# EAGLE board i-uC (EAGLE 5.07)
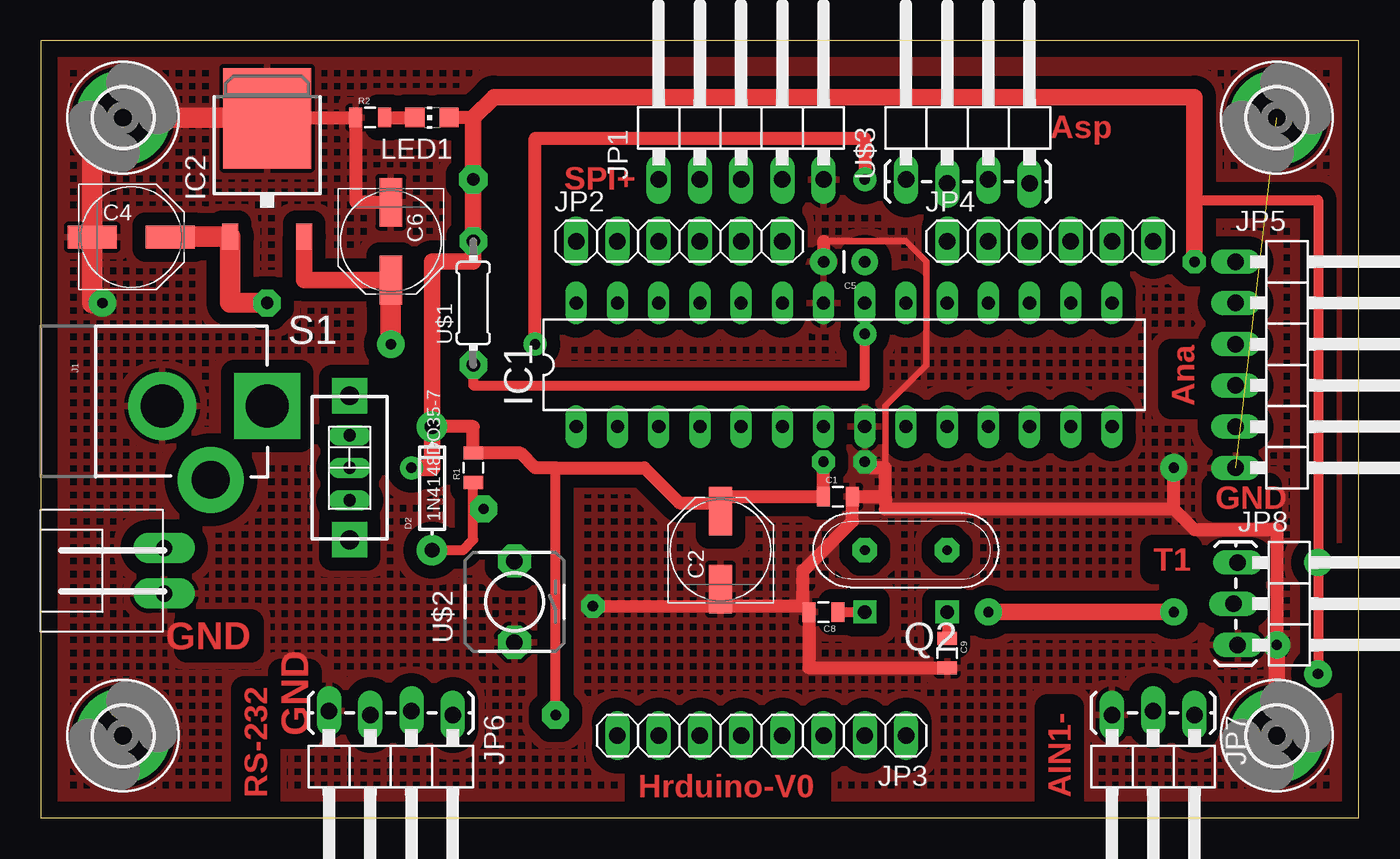
[diagram p0: board, top side]
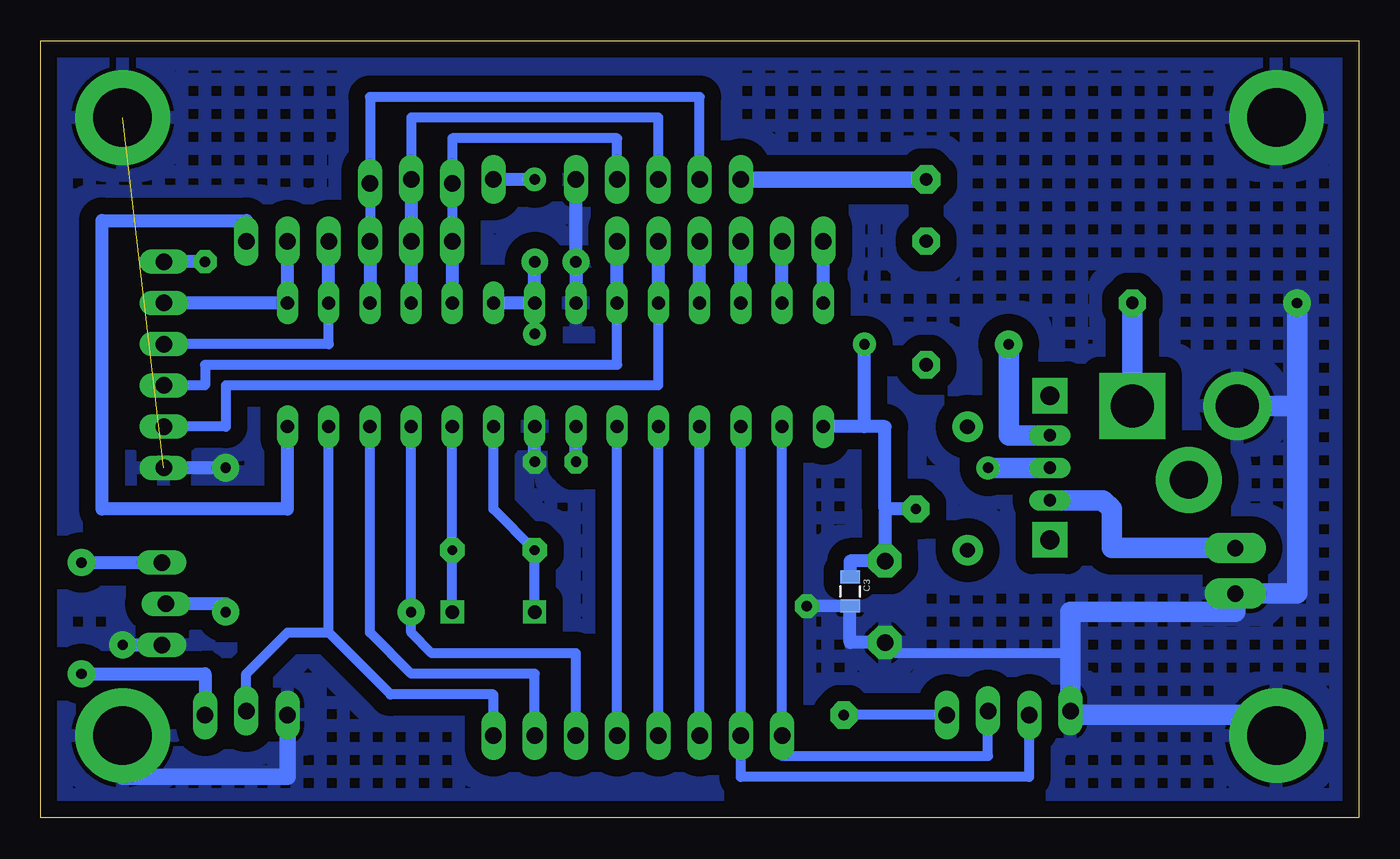
[diagram p1: board, bottom side, seen from below]

Size 81.26 x 47.93 mm. Coordinates in mm from the lower left corner, seen from the top.
Outline: 0,0 81.26,0 81.26,47.93 0,47.93 0,0
Copper layers (1*16): Top 0.035mm / dielectric 1.5mm / Bottom 0.035mm
Design rules "default": minimum track width 10mil, minimum drill 24mil, track to track 8mil, track to pad 8mil, pad to pad 8mil, via to via 8mil, smd to smd 8mil, copper to edge 40mil, drill to drill 8mil, minimum pad ring 10mil, minimum via ring 8mil, stop-mask expansion 4mil, vias tented up to drill 0mil, thermal gap 10mil

## Footprints (pad centres in the part's own frame; a part is rotated, then mirrored left to right if it is on the bottom)
0805 = smd 0.8 x 1.2: 1 -0.9,0; 2 0.9,0
PANASONIC_D = smd 3 x 1.4: + 2.4,0; - -2.4,0
CAP-PTH-SMALL = drill 0.7 pad 1.651 round: 1 0,0; 2 2.54,0
DIODE-1N4148 = drill 0.9 pad 1.88 round: A -3.81,0; C 3.81,0
3,6-PAD = drill 3.6 pad 5.842 round: B3,6 0,0
DIL28-3 = drill 0.813 long: 1 -16.51,-3.81; 2 -13.97,-3.81; 3 -11.43,-3.81; 4 -8.89,-3.81; 5 -6.35,-3.81; 6 -3.81,-3.81; 7 -1.27,-3.81; 8 1.27,-3.81; 9 3.81,-3.81; 10 6.35,-3.81; 11 8.89,-3.81; 12 11.43,-3.81; 13 13.97,-3.81; 14 16.51,-3.81; 15 16.51,3.81; 16 13.97,3.81; 17 11.43,3.81; 18 8.89,3.81; 19 6.35,3.81; 20 3.81,3.81; 21 1.27,3.81; 22 -1.27,3.81; 23 -3.81,3.81; 24 -6.35,3.81; 25 -8.89,3.81; 26 -11.43,3.81; 27 -13.97,3.81; 28 -16.51,3.81
TO252 = smd 1 x 1.6: 1 -2.28,-4.8; 2 2.28,-4.8 | smd 5.4 x 6.2: 3 0,2.5
POWER_JACK_2.1X5.5_BIG_PTH = drill 2.667 pad 4.191 round: GND 0,-0.127 | drill 2.337 pad 4.064 round: GNDBREAK 4.547,2.87 | drill 2.667 pad 4.064 square: PWR 0,6.35
1X05/90 = drill 1.016 long: 1 -5.08,-3.81; 2 -2.54,-3.81; 3 0,-3.81; 4 2.54,-3.81; 5 5.08,-3.81
1X06 = drill 1.016 long: 1 -6.35,0; 2 -3.81,0; 3 -1.27,0; 4 1.27,0; 5 3.81,0; 6 6.35,0
1X08 = drill 1.016 long: 1 -8.89,0; 2 -6.35,0; 3 -3.81,0; 4 -1.27,0; 5 1.27,0; 6 3.81,0; 7 6.35,0; 8 8.89,0
1X06/90 = drill 1.016 long: 1 -6.35,-3.81; 2 -3.81,-3.81; 3 -1.27,-3.81; 4 1.27,-3.81; 5 3.81,-3.81; 6 6.35,-3.81
1X04/90_LOCK = drill 1.016 long: 1 -3.81,-3.81; 2 -1.27,-4.064; 3 1.27,-3.81; 4 3.81,-4.064
1X03/90_LOCK = drill 1.016 long: 1 -2.54,-2.54; 2 0,-2.794; 3 2.54,-2.54
XH-1X2-LONG-LOCK = drill 1.016 pad 1.88 long: 1 -1.397,0; 2 1.397,0
CHIP-LED0805 = smd 1.2 x 1.2: A 0,-1.05; C 0,1.05
XTAL = drill 0.61 pad 1.524 octagon: 1 -2.54,0; 2 2.54,0
SWITCH-SPDT-AM#6 = drill 0.762 pad 1.27 long: 1 0,2; 2 0,0; 3 0,-2 | drill 1.15 pad 2.184 square: P$1 0,-4.445; P$2 0,4.445
0204/7 = drill 0.813 pad 1.676 octagon: 1 -3.81,0; 2 3.81,0
ALPS-SKHV = drill 1.016 pad 2.032 octagon: 2 -2.51,0; 3 2.51,0

## Placement (x,y rotation side)
C1  100n  [0805]  49.15,19.81 0 top
C2  100u  [PANASONIC_D]  41.91,16.51 90 top
C3  100n  [0805]  31.37,13.97 270 bottom
C4  100u  [PANASONIC_D]  5.59,35.81 0 top
C5  104  [CAP-PTH-SMALL]  50.8,34.29 180 top
C6  100u  [PANASONIC_D]  21.59,35.56 270 top
C8  33pF  [0805]  48.26,12.7 180 top
C9  33pF  [0805]  55.88,10.16 270 top
D2  1N4148DO35-7  [DIODE-1N4148]  24.13,20.32 90 top
H1  MOUNT-PAD-ROUND3.6  [3,6-PAD]  76.2,5.08 0 top
H2  MOUNT-PAD-ROUND3.6  [3,6-PAD]  5.08,43.18 0 top
H3  MOUNT-PAD-ROUND3.6  [3,6-PAD]  5.08,5.08 0 top
H4  MOUNT-PAD-ROUND3.6  [3,6-PAD]  76.2,43.18 0 top
IC1  MEGA8-P  [DIL28-3]  49.53,27.94 0 top
IC2  7805DT  [TO252]  13.97,40.64 0 top
J1  POWER_JACKPTH_BIG  [POWER_JACK_2.1X5.5_BIG_PTH]  7.62,25.4 270 top
JP1  SPI  [1X05/90]  43.18,43.18 0 top
JP2  PORTC  [1X06]  39.37,35.56 0 top
JP3  PORTD  [1X08]  44.45,5.08 180 top
JP4  PORTB  [1X06]  62.23,35.56 0 top
JP5  ANALOG  [1X06/90]  77.47,27.94 270 top
JP6  RS-232  [1X04/90_LOCK]  21.59,2.54 180 top
JP7  AIN  [1X03/90_LOCK]  68.58,3.81 180 top
JP8  T1  [1X03/90_LOCK]  76.33,13.21 270 top
JP9  [XH-1X2-LONG-LOCK]  7.62,15.24 90 top
LED1  RED  [CHIP-LED0805]  24.13,43.18 90 top
Q2  12Mhz  [XTAL]  53.34,16.51 180 top
R1  10k  [0805]  26.67,21.59 90 top
R2  400R  [0805]  20.32,43.18 0 top
S1  [SWITCH-SPDT-AM#6]  19.05,21.59 0 top
U$1  10uH  [0204/7]  26.67,31.75 90 top
U$2  TACT_SWITCH-2-PTH  [ALPS-SKHV]  29.21,13.34 90 top
U$3  AVR_USBASP_41X4/90_LOCK  [1X04/90_LOCK]  57.15,43.18 0 top

## Library data of the parts
C1 C5 = SparkFun
C2-C4 C6 C8 C9 D2 J1 JP6-JP9 R1 R2 S1 U$1-U$3 = digital-toy
H1-H4 = holes
IC1 = atmel
IC2 = linear
JP1-JP5 = pinhead
LED1 = led
Q2 = yhf_spec-RF

## Nets
ADC_A: IC1.23 JP2.6 JP5.4
ADC_B: IC1.24 JP2.5 JP5.5
AIN1: IC1.13 JP3.1 JP7.2
AVCC: C5.1 IC1.20 IC1.21 U$1.1
GND: C1.2 C2.- C3.2 C4.- C5.2 C6.- C8.2 C9.2 H1.B3,6 H2.B3,6 H3.B3,6 H4.B3,6 IC1.8 IC1.22 IC2.3 J1.GND JP1.5 JP5.6 JP6.4 JP7.3 JP8.3 JP9.1 R2.1 U$2.2
MISO: IC1.18 JP1.3 JP4.2 U$3.3
MOSI: IC1.17 JP1.2 JP4.3 U$3.4
N$1: C6.+ IC2.2 S1.1
N$2: C9.1 IC1.10 Q2.1
N$3: JP9.2 S1.3
N$4: LED1.C R2.2
N$5: C4.+ IC2.1 J1.PWR
N$8: IC1.25 JP2.4
N$9: IC1.26 JP2.3
N$10: IC1.27 JP2.2
N$11: IC1.28 JP2.1
N$14: IC1.4 JP3.6
N$15: IC1.5 JP3.5
N$16: IC1.6 JP3.4
N$18: IC1.12 JP3.2
N$20: IC1.14 JP4.6
N$34: C8.1 IC1.9 Q2.2
PWM_A: IC1.15 JP4.5 JP5.2
PWM_B: IC1.16 JP4.4 JP5.3
RST: C3.1 D2.A IC1.1 R1.1 U$2.3 U$3.1
RXD: IC1.2 JP3.8 JP6.2
SCK: IC1.19 JP1.4 JP4.1 U$3.2
T1: IC1.11 JP3.3 JP8.2
TXD: IC1.3 JP3.7 JP6.3
VCC: C1.1 C2.+ D2.C IC1.7 JP1.1 JP5.1 JP6.1 JP7.1 JP8.1 LED1.A R1.2 S1.2 U$1.2

## Tracks (layer width: path | path; a pad name or v marks a point on that pad's centre or on a via)
ADC_A
  Bottom 0.61: IC1.23 45.72,27.94 71.12,27.94 71.12,26.67 JP5.4
  Bottom 0.813: IC1.23 JP2.6
ADC_B
  Bottom 0.61: IC1.24 43.18,26.67 69.85,26.67 69.85,24.13 JP5.5
  Bottom 0.813: IC1.24 JP2.5
AIN1
  Bottom 0.61: JP3.1 53.34,7.62 59.69,7.62 63.5,11.43 | 63.5,11.43 IC1.13 | JP7.2 68.58,8.89 66.04,11.43 63.5,11.43
AVCC  (via drill 0.64 pad 1.42)
  Top 0.61: v50.8,29.84 50.8,26.67 26.67,26.67 U$1.1
  Bottom 0.61: v50.8,29.84 IC1.21
  Bottom 0.813: C5.1 IC1.21 IC1.20
GND  (via drill 0.64 pad 1.42, 0.64 pad 1.68)  (1 unrouted)
  Top 0.254: 41.91,13.08 C2.- | C8.2 46.98,13.08 46.99,13.09
  Top 0.406: 48.26,35.56 53.34,35.56 54.61,34.29 54.61,27.94 52.07,25.4 52.07,21.59
  Top 0.61: 12.7,44.08 IC2.3 | 51.17,21.59 v50.8,21.96
  Top 0.813: v34.04,13.06 41.91,13.08 46.98,13.08 | 48.26,35.56 C5.2 | 51.17,21.59 52.07,21.59 52.07,19.81 | 46.99,13.09 46.99,15.24 50.05,18.3 C1.2 52.07,19.81 | C9.2 47.36,9.26 C8.2 | 69.85,19.05 v69.85,21.59 | 69.85,19.05 52.07,19.05 52.07,19.81 | 12.7,43.18 12.7,44.08 | v76.2,10.67 76.2,17.78 71.12,17.78 69.85,19.05 | IC2.3 13.97,43.18 R2.1 19.42,37.97 C6.-
  Top 1.016: v76.2,10.67 H1.B3,6
  Top 1.27: v3.81,31.75 3.17,31.75 C4.- 3.17,43.18 H2.B3,6 12.7,43.18
  Bottom 0.61: U$2.2 28.54,10.16 17.78,10.16
  Bottom 0.813: v50.8,21.96 IC1.8 | v34.04,13.06 C3.2 31.37,10.82 U$2.2 | IC1.22 C5.2 JP1.5 | v69.85,21.59 JP5.6 | v76.2,10.67 JP8.3 | 17.78,6.35 JP6.4
  Bottom 1.016: JP7.3 66.04,2.54 76.2,2.54 H1.B3,6
  Bottom 1.27: H3.B3,6 6.35,5.08 6.35,6.35 17.78,6.35 | JP6.4 17.78,10.16 17.78,12.7 7.62,12.7 JP9.1 3.81,13.84 3.81,25.4 | 3.81,25.4 J1.GND | 3.81,25.4 v3.81,31.75
  pour Top (isolate 0.813, hatched): 8.89,59.69 91.44,55.88 99.06,41.91 105.41,10.16 96.52,-12.7 6.35,-13.97 -11.43,3.81 -12.7,50.8
  pour Bottom (isolate 1.016, hatched): 86.36,57.15 90.17,17.78 96.52,8.89 78.74,-8.89 3.81,-8.89 -5.08,5.08 -3.81,52.07
MISO
  Bottom 0.61: JP1.3 43.18,43.18 58.42,43.18 U$3.3
  Bottom 0.813: IC1.18 JP4.2 U$3.3
MOSI
  Bottom 0.61: JP1.2 40.64,44.45 60.96,44.45 U$3.4 JP4.3
  Bottom 0.813: JP4.3 IC1.17
N$1  (via drill 0.64 pad 1.68)
  Top 1.016: IC2.2 16.26,33.17 C6.+
  Top 1.27: v21.59,29.21 C6.+
  Bottom 1.27: S1.1 21.59,23.59 v21.59,29.21
N$2  (via drill 0.84 pad 1.42)
  Top 0.61: C9.1 v55.88,12.7
  Bottom 0.61: IC1.10 Q2.1 v55.88,12.7
N$3
  Bottom 1.27: JP9.2 15.24,16.64 15.24,19.05 15.78,19.59 S1.3
N$4
  Top 0.813: R2.2 LED1.C
N$5  (via drill 0.76 pad 1.68)
  Top 0.813: 9.53,35.84 C4.+
  Top 1.27: 9.53,35.84 IC2.1 11.68,31.78 v13.97,31.75
  Bottom 1.27: J1.PWR v13.97,31.75
N$8
  Bottom 0.813: IC1.25 JP2.4
N$9
  Bottom 0.813: IC1.26 JP2.3
N$10
  Bottom 0.813: IC1.27 JP2.2
N$11
  Bottom 0.813: IC1.28 JP2.1
N$14
  Bottom 0.61: JP3.6 IC1.4
N$15
  Bottom 0.61: JP3.5 IC1.5
N$16
  Bottom 0.61: JP3.4 IC1.6
N$18
  Bottom 0.61: JP3.2 50.8,8.89 58.42,8.89 60.96,11.43 IC1.12
N$20
  Bottom 0.813: IC1.14 66.04,19.05 77.47,19.05 77.47,36.83 68.58,36.83 JP4.6
N$34  (via drill 0.84 pad 1.42)
  Top 0.61: C8.1 v50.8,12.7
  Bottom 0.61: IC1.9 53.34,19.05 Q2.2 v50.8,12.7
PWM_A
  Bottom 0.813: JP5.2 IC1.15 JP4.5
PWM_B
  Bottom 0.61: IC1.16 63.5,29.21 JP5.3
  Bottom 0.813: IC1.16 JP4.4
RST  (via drill 0.64 pad 1.42, 0.64 pad 1.68)
  Top 0.61: 26.67,19.05 v27.3,19.05 | 26.67,19.05 R1.1 | 26.67,19.05 26.67,17.14 26.04,16.51 D2.A
  Top 0.813: v30.48,29.21 30.48,41.91 50.8,41.91 v50.8,39.37
  Bottom 0.813: v50.8,39.37 U$3.1 | 29.21,19.05 U$2.3 31.37,15.85 C3.1 | 29.21,19.05 29.21,24.13 30.48,24.13 | 30.48,24.13 IC1.1 | 30.48,24.13 v30.48,29.21 | v27.3,19.05 29.21,19.05
RXD
  Bottom 0.61: IC1.2 JP3.8 35.56,3.81 22.86,3.81 JP6.2
SCK
  Bottom 0.61: JP1.4 45.72,41.91 55.88,41.91 U$3.2 JP4.1
  Bottom 0.813: JP4.1 IC1.19
T1  (via drill 0.64 pad 1.68)
  Top 1.016: v58.42,12.7 v69.85,12.7
  Bottom 0.61: JP3.3 48.26,10.16 57.15,10.16 58.42,11.43 v58.42,12.7 IC1.11
  Bottom 0.813: JP8.2 69.85,13.21 v69.85,12.7
TXD
  Bottom 0.61: IC1.3 JP3.7 38.1,2.54 20.32,2.54 JP6.3
VCC  (via drill 0.64 pad 1.42, 0.64 pad 1.68, 0.76 pad 1.78)
  Top 0.254: 41.78,19.81 C2.+ 41.91,19.43
  Top 0.61: 39.37,19.43 39.24,19.43 | v31.75,6.35 31.75,21.59 | v78.74,8.89 v78.74,15.75 78.74,38.1 71.12,38.1
  Top 0.813: 41.78,19.81 C1.1 v48.26,21.96 | 41.91,19.43 39.37,19.43 37.21,21.59 31.75,21.59 30.48,21.59 29.58,22.49 R1.2 26.67,24.13 D2.C | 26.67,43.18 LED1.A
  Top 1.016: v71.12,34.29 71.12,38.1 71.12,44.45 27.94,44.45 26.67,43.18 v26.67,39.37 U$1.2 26.67,34.29 24.13,34.29 D2.C 24.13,21.59 v22.86,21.59
  Bottom 0.61: JP6.1 v31.75,6.35
  Bottom 0.813: v48.26,21.96 IC1.7 | v71.12,34.29 JP5.1 | JP7.1 71.12,8.89 v78.74,8.89 | v78.74,15.75 JP8.1
  Bottom 1.016: v26.67,39.37 JP1.1
  Bottom 1.27: v22.86,21.59 S1.2

## Text on the board
Top: Asp | SPI+ | Ana | GND | T1 | GND | GND | RS-232 | Hrduino-V0 | AIN1-